# Altium PCB react4.PcbDoc
Units mil, origin at the board's own origin, x right, y up, seen from the top; angles counter-clockwise.
Board outline 3937.01 x 3937.01 mil, 2 copper layers (Top Layer, Bottom Layer), stack 61.756 mil thick; 64 components, 47 nets, 185 pads, 190 vias.
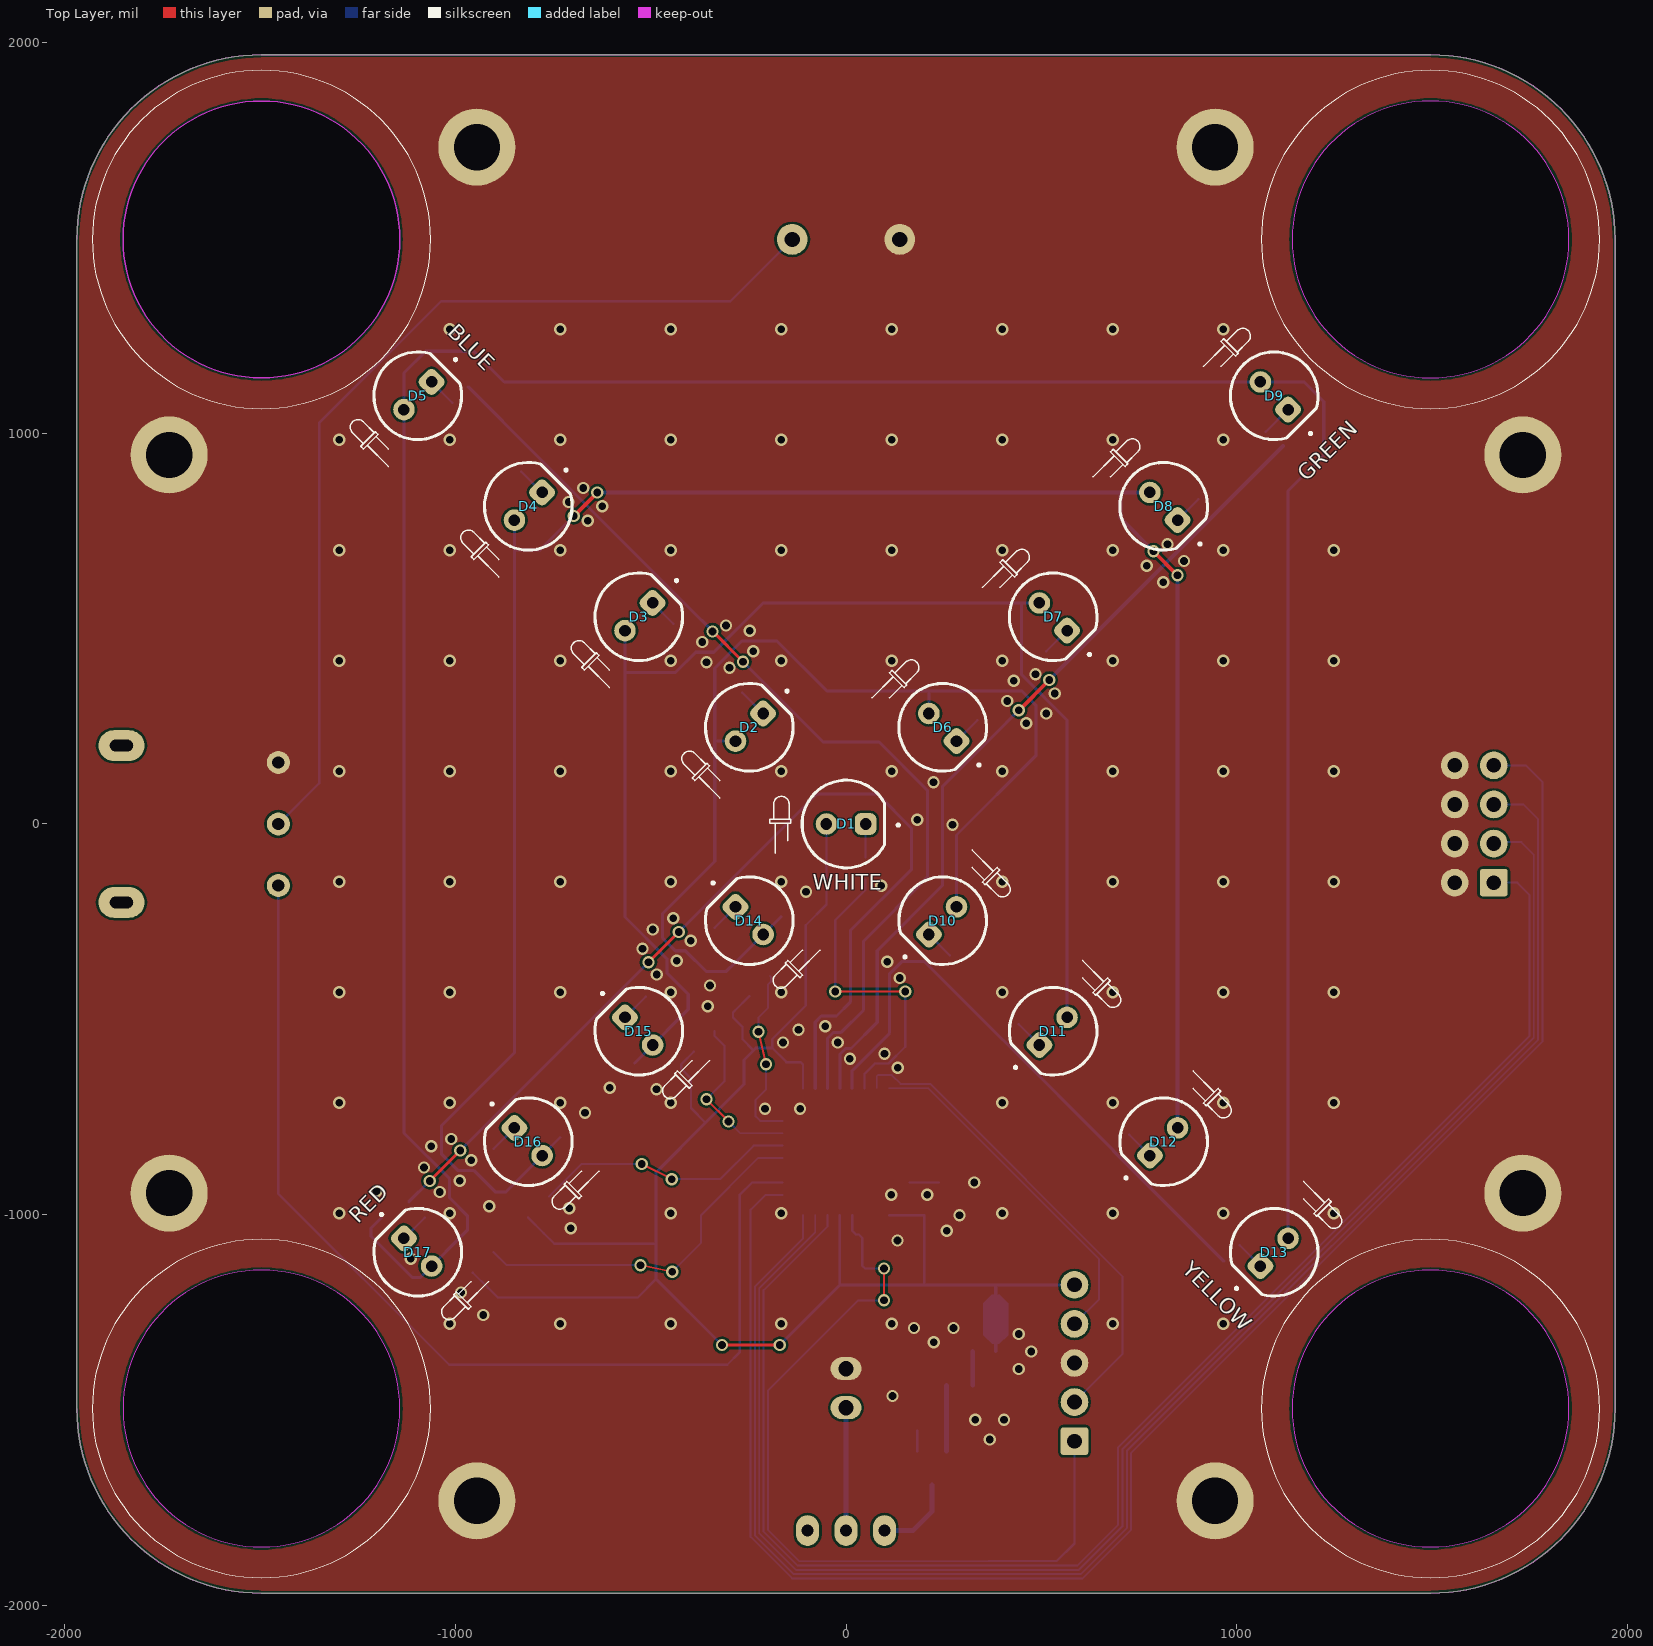
[diagram p0: Top Layer view]
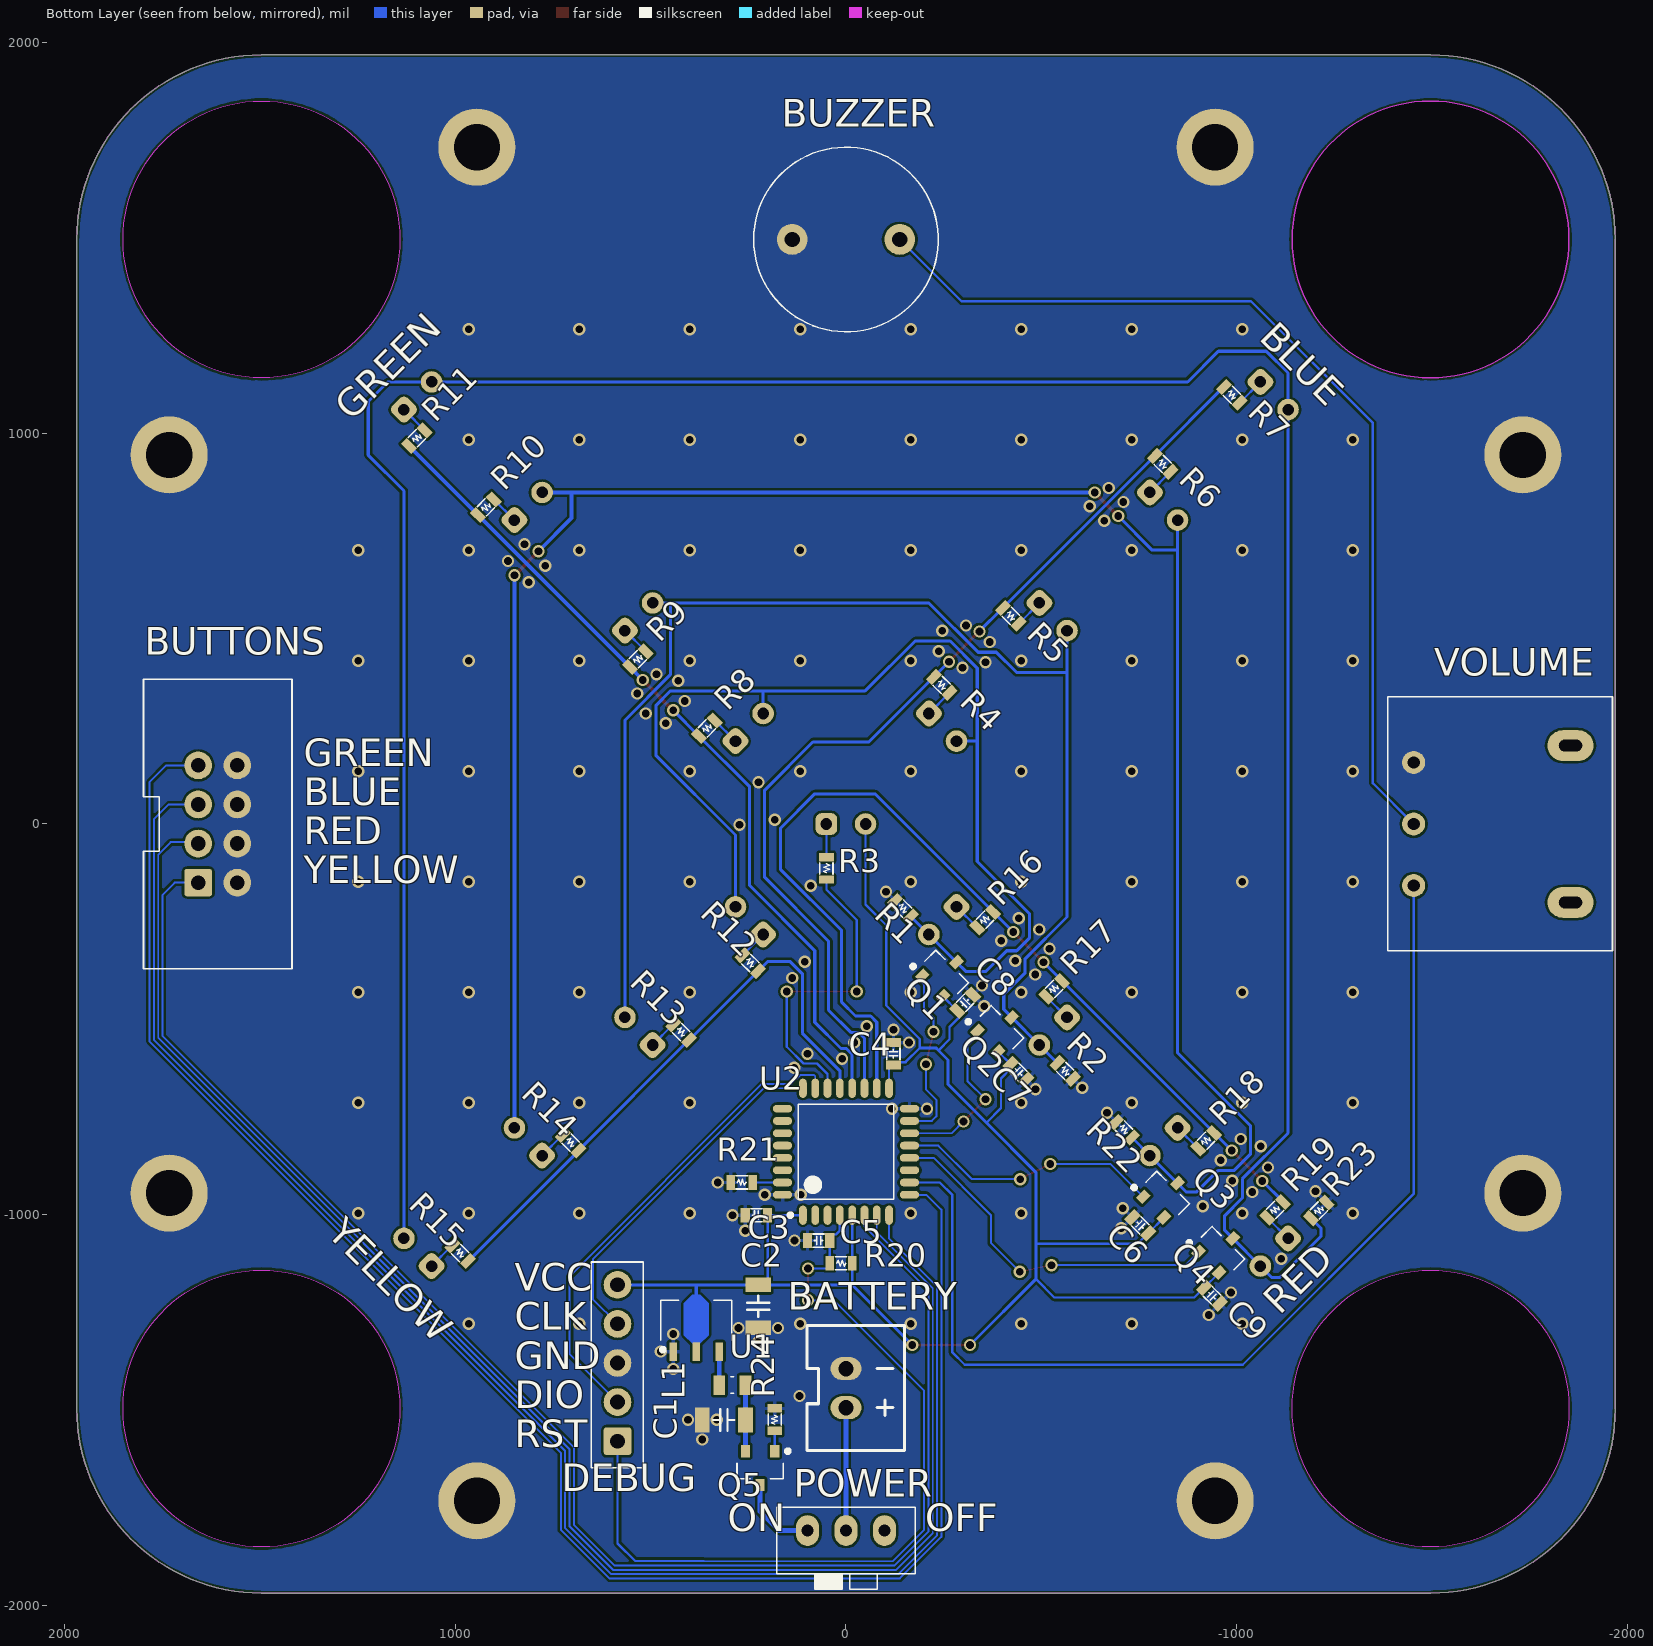
[diagram p1: Bottom Layer view, seen from below]
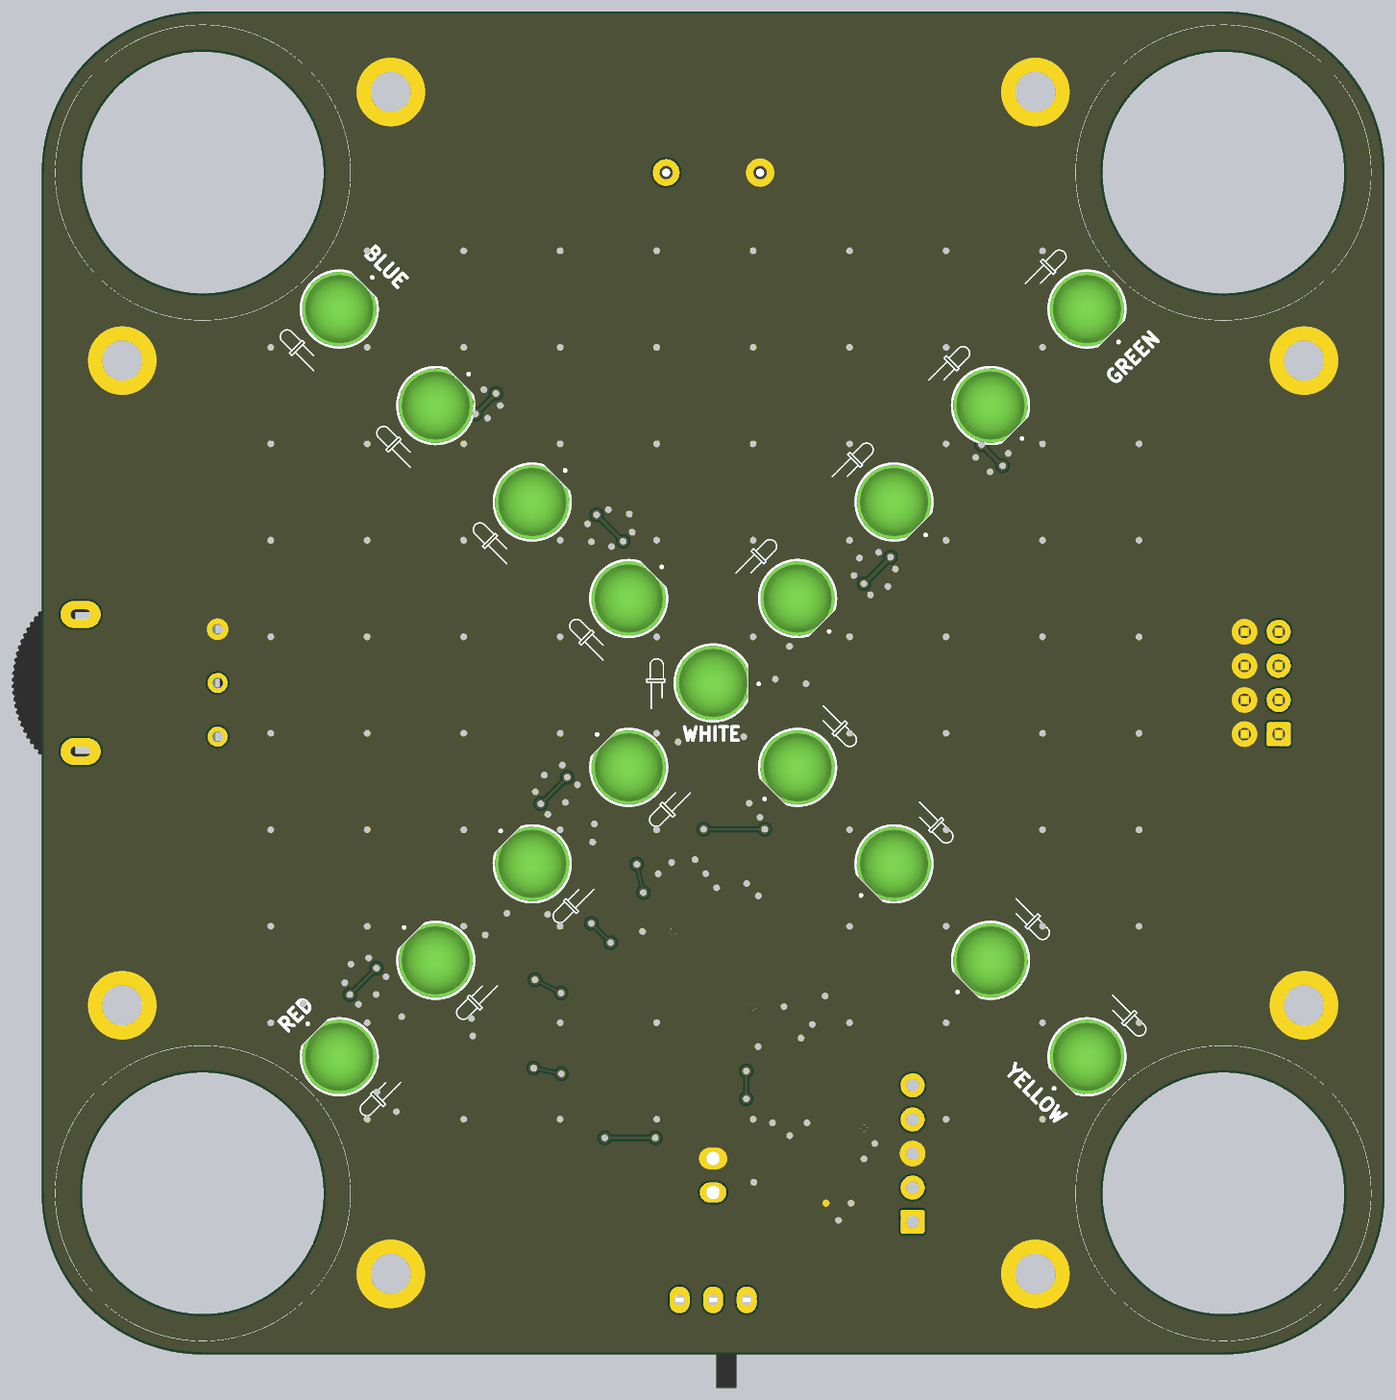
[diagram p2: 3D render of the assembled board from above, using the file's embedded part models]
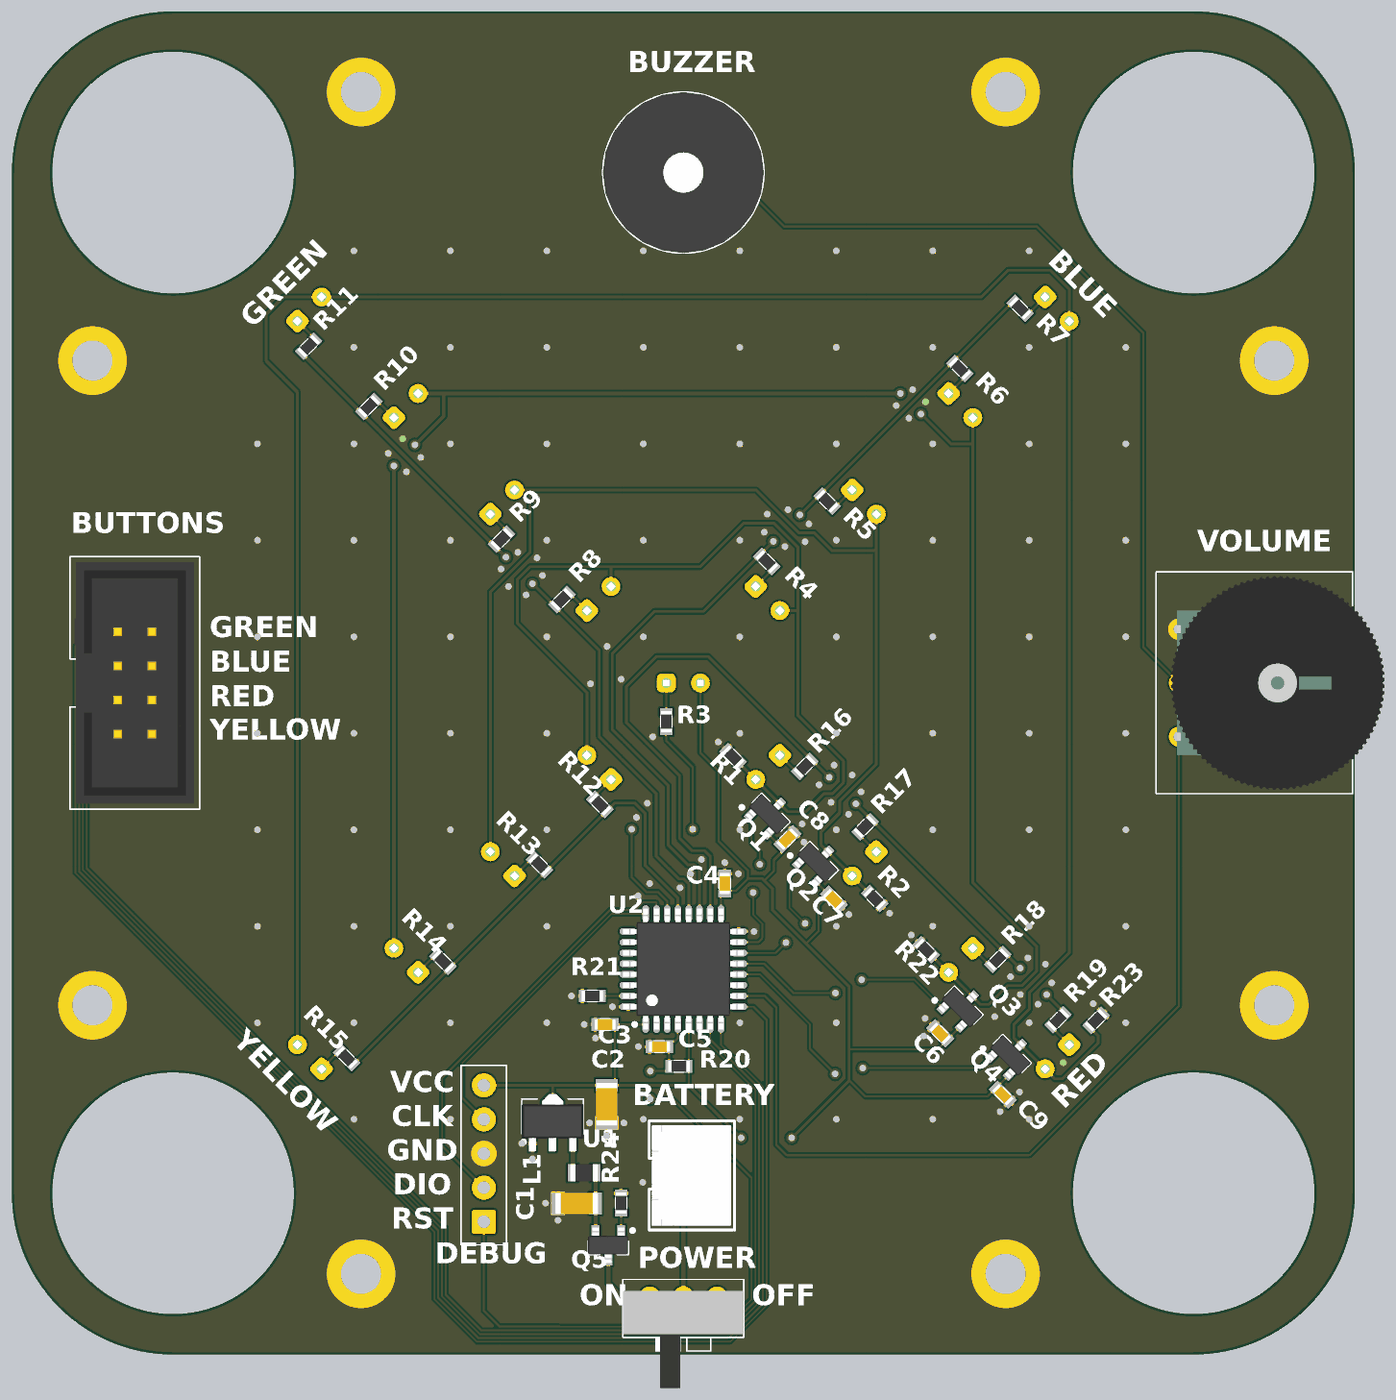
[diagram p3: 3D render of the assembled board from below, using the file's embedded part models]

## Layer stack, top to bottom
Top Solder: solder mask 1, SM-001, Dk 4
Top Layer: signal copper 1.378
Dielectric 1: core 59, Core-043, Dk 4.3
Bottom Layer: signal copper 1.378
Bottom Solder: solder mask 1, SM-001, Dk 4

## Board outline
-1968.5,-1496.06 ccw(c-1496.06,-1496.06) -1496.06,-1968.5 1496.06,-1968.5 ccw(c1496.06,-1496.06) 1968.5,-1496.06 1968.5,1496.06 ccw(c1496.06,1496.06) 1496.06,1968.5 -1496.06,1968.5 ccw(c-1496.06,1496.06) -1968.5,1496.06
cut-out: 1141.73,-1496.06 ccw(c1496.06,-1496.06) 1496.06,-1850.39 ccw(c1496.06,-1496.06) 1850.39,-1496.06 ccw(c1496.06,-1496.06) 1496.06,-1141.73 ccw(c1496.06,-1496.06)
cut-out: -1850.39,-1496.06 ccw(c-1496.06,-1496.06) -1496.06,-1850.39 ccw(c-1496.06,-1496.06) -1141.73,-1496.06 ccw(c-1496.06,-1496.06) -1496.06,-1141.73 ccw(c-1496.06,-1496.06)
cut-out: -1496.06,1141.73 cw(c-1496.06,1496.06) -1850.39,1496.06 cw(c-1496.06,1496.06) -1496.06,1850.39 cw(c-1496.06,1496.06) -1141.73,1496.06 cw(c-1496.06,1496.06)
cut-out: 1141.73,1496.06 ccw(c1496.06,1496.06) 1496.06,1141.73 ccw(c1496.06,1496.06) 1850.39,1496.06 ccw(c1496.06,1496.06) 1496.06,1850.39 ccw(c1496.06,1496.06)

## Design rules (kind name [scope] priority, off if disabled: settings)
Clearance [All] p1: gap=6 ignorepadtopadclearanceinfootprint=FALSE
HoleSize [All] p1: absolutevalues=TRUE maxlimit=300 minlimit=1 maxpercent=80.000 minpercent=20.000
MinimumSolderMaskSliver [All] p1: minsoldermaskwidth=5
PolygonConnect BIG_PADS [InNet('GND') vs AsMM(PadXSize_AllLayers) > 1] p1: connectstyle=Direct reliefconductorwidth=10 reliefentries=4 polygonreliefangle="90 Angle" airgapwidth=10
PolygonConnect GND_VIA [All vs PadViaLibraryTemplate='gnd_via'] p2: connectstyle=Direct reliefconductorwidth=10 reliefentries=4 polygonreliefangle="90 Angle" airgapwidth=10
PolygonConnect [All] p3: connectstyle=Relief reliefconductorwidth=10 reliefentries=4 polygonreliefangle="90 Angle" airgapwidth=6
RoomDefinition [OnLayer('Bottom Layer') And ComponentType = 'Standard'] p1: confinementstyle=ConfineIn formatcopy=TRUE lockcomponents=FALSE outline 334.65,1968.51 1968.5,334.65 1968.5,-334.65 334.65,-1968.5 334.65,-2165.35 -334.65,-2165.35 -334.65,-1968.5 -1968.5,-334.65 -2165.35,-334.65 -2165.35,334.65 -1968.5,334.65 -334.65,1968.5
RoutingVias [All] p1: holewidth=28 width=50 viastyle="Through Hole" minholewidth=28 minwidth=50 maxholewidth=28 maxwidth=50 useviatemplates=TRUE viatemplateguid#1={0382FDFF-0C0C-4C60-A3A5-E7C098C6B0BB} viatemplateguid#2={80516C12-B6F9-4413-913B-5A1EBC396472} viatemplatename#1=gnd_via viatemplatename#2=routing_via
SilkToSilkClearance [All] p1: silktosilkclearance=0
SilkToSolderMaskClearance [IsPad] p1: minsilkscreentomaskgap=0 clearancetoexposedcopper=TRUE
SolderMaskExpansion [All] p1: expansion=1.97 istentingtop=FALSE
Width [All] p1: maxlimit=100 minlimit=5 preferedwidth=5 minimp=50.000000 maximp=50.000000 favimp=50.000000
26 further rules are at their usual default settings.

## Components (designator, comment, footprint, x,y, rotation, side; value= is the part's Value field where it differs from the comment)
BATTERY "BATTERY" BATTERY_CONNECTOR 0,-1443.82 r90 bottom
BUTTONS "CON8" CON8 1657.95,-150 r90 bottom
BUZZER "BUZZER" PIEZO_BUZZER 0,1496.06 r180 bottom
C1 "Capacitor" CAPC_1206_3216X16L 312.41,-1525.56 r180 bottom value=10uF
C2 "Capacitor" CAPC_1206_3216X16L 224.59,-1234.61 r90 bottom value=10uF
C3 "CAPACITOR" CAPC_0603_1608X08L 229.16,-1001.19 r180 bottom value=100nF
C4 "CAPACITOR" CAPC_0603_1608X08L -121.47,-588.02 r270 bottom value=100nF
C5 "CAPACITOR" CAPC_0603_1608X08L 70.07,-1066.03 r180 bottom value=100nF
C6 "CAPACITOR" CAPC_0603_1608X08L -753.19,-1027.1 r225 bottom value=100nF
C7 "CAPACITOR" CAPC_0603_1608X08L -441.46,-634.67 r45 bottom value=100nF
C8 "CAPACITOR" CAPC_0603_1608X08L -304.84,-457.67 r315 bottom value=100nF
C9 "CAPACITOR" CAPC_0603_1608X08L -936.69,-1207.18 r45 bottom value=100nF
D1 "WHITE" "LED WHITE" 0,0 r90 top value=10mA
D2 "BLUE" "LED BLUE" -247.49,247.49 r135 top value=2mA
D3 "BLUE" "LED BLUE" -530.33,530.33 r135 top value=2mA
D4 "BLUE" "LED BLUE" -813.17,813.17 r135 top value=2mA
D5 "BLUE" "LED BLUE" -1096.02,1096.02 r135 top value=2mA
D6 "GREEN" "LED GREEN" 247.49,247.49 r45 top value=16mA
D7 "GREEN" "LED GREEN" 530.33,530.33 r45 top value=16mA
D8 "GREEN" "LED GREEN" 813.17,813.17 r45 top value=16mA
D9 "GREEN" "LED GREEN" 1096.02,1096.02 r45 top value=16mA
D10 "YELLOW" "LED YELLOW" 247.49,-247.49 r315 top value=10mA
D11 "YELLOW" "LED YELLOW" 530.33,-530.33 r315 top value=10mA
D12 "YELLOW" "LED YELLOW" 813.17,-813.17 r315 top value=10mA
D13 "YELLOW" "LED YELLOW" 1096.02,-1096.02 r315 top value=10mA
D14 "RED" "LED RED" -247.49,-247.49 r225 top value=5mA
D15 "RED" "LED RED" -530.33,-530.33 r225 top value=5mA
D16 "RED" "LED RED" -813.17,-813.17 r225 top value=5mA
D17 "RED" "LED RED" -1096.02,-1096.02 r225 top value=5mA
DEBUG "CON5" CON5 584.78,-1579.49 r90 bottom
L1 "INDUCTOR" Chip2PinSM127P600-8N 290.76,-1436.12 r0 bottom value=6.8uH
POWER "MK-12D18" MK-12D18 0,-1808.41 r180 bottom
Q1 "NX2301P" SOT95P237X110-3L -252.22,-384.18 r135 bottom
Q2 "NX2301P" SOT95P237X110-3L -393.64,-525.6 r135 bottom
Q3 "NX2301P" SOT95P237X110-3L -817.91,-949.86 r135 bottom
Q4 "NX2301P" SOT95P237X110-3L -959.33,-1091.28 r135 bottom
Q5 "NX2301P" SOT95P237X110-3L 219.89,-1648.4 r270 bottom
R1 "Resistor" RESC_0603_1608X08L -145.99,-216.7 r45 bottom value=10K
R2 "Resistor" RESC_0603_1608X08L -561.12,-631.83 r225 bottom value=10K
R3 "Resistor" RESC_0603_1608X08L 50,-113.54 r90 bottom value=330
R4 "Resistor" RESC_0603_1608X08L -244.98,356.06 r225 bottom value=1.6K
R5 "Resistor" RESC_0603_1608X08L -421.76,532.84 r225 bottom value=1.6K
R6 "Resistor" RESC_0603_1608X08L -810.67,921.74 r225 bottom value=1.6K
R7 "Resistor" RESC_0603_1608X08L -987.44,1098.52 r225 bottom value=1.6K
R8 "Resistor" RESC_0603_1608X08L 356.06,244.98 r135 bottom value=200
R9 "Resistor" RESC_0603_1608X08L 532.84,421.76 r135 bottom value=200
R10 "Resistor" RESC_0603_1608X08L 921.74,810.67 r135 bottom value=200
R11 "Resistor" RESC_0603_1608X08L 1098.52,987.44 r135 bottom value=200
R12 "Resistor" RESC_0603_1608X08L 244.98,-356.06 r45 bottom value=330
R13 "Resistor" RESC_0603_1608X08L 421.76,-532.84 r45 bottom value=330
R14 "Resistor" RESC_0603_1608X08L 704.6,-815.68 r45 bottom value=330
R15 "Resistor" RESC_0603_1608X08L 987.44,-1098.52 r45 bottom value=330
R16 "Resistor" RESC_0603_1608X08L -356.06,-244.98 r315 bottom value=680
R17 "Resistor" RESC_0603_1608X08L -532.84,-421.76 r315 bottom value=680
R18 "Resistor" RESC_0603_1608X08L -921.74,-810.67 r315 bottom value=680
R19 "Resistor" RESC_0603_1608X08L -1098.52,-987.44 r315 bottom value=680
R20 "Resistor" RESC_0603_1608X08L 12.79,-1124.08 r180 bottom value=10K
R21 "Resistor" RESC_0603_1608X08L 266.92,-917.53 r0 bottom value=10K
R22 "Resistor" RESC_0603_1608X08L -711.67,-782.38 r45 bottom value=10K
R23 "Resistor" RESC_0603_1608X08L -1210.18,-988.82 r135 bottom value=10K
R24 "Resistor" RESC_0603_1608X08L 182.49,-1524.48 r270 bottom value=1K
U1 "QX2304L33E" SOT89-150P350X160-3L 383.28,-1285.3 r90 bottom
U2 "STM32F030K6" TQFP80P900X900X160-32L -0.01,-838.79 r90 bottom
VOLUME "POTENTIOMETER" POTENTIOMETER -1742.18,0 r270 bottom value=10K

## Footprints (in the part's own frame and the unit in brackets; to place one, negate y for a bottom-side part, rotate by r counter-clockwise, add the part's x,y. Pads: shape width x height; smd on the part's side, far side on the other; paste and mask are expansions set on the pad)
BATTERY_CONNECTOR [mm]
  oval 1.5x2 hole 1: 1(1.27,0) 2(-1.27,0)
  silkscreen extent -4.06,-3.81 4.06,2.54, body extent -3.75,-3.55 3.75,2.35, height 7
CAPC_0603_1608X08L [mm] "Chip Capacitor 0603"
  rrect1% 0.6x0.95 smd: 1(-0.725,0) 2(0.725,0)
  silkscreen extent -0.38,-0.43 0.38,0.43, body extent -0.8,-0.4 0.8,0.4, height 0.8
CAPC_1206_3216X16L [mm] "Chip Capacitor 1206"
  rrect1% 0.95x1.65 smd: 1(-1.4,0) 2(1.4,0)
  silkscreen extent -0.69,-0.71 0.69,0.71, body extent -1.6,-0.8 1.6,0.8, height 1.6
Chip2PinSM127P600-8N [mm] "Inductor 0805"
  rrect1% 0.76x1.27 smd: 1(-0.85,0) 2(0.85,0)
  silkscreen extent -0.1,-0.54 0.1,0.54, body extent -1.05,-0.65 1.05,0.65, height 0.5
CON5 [mm]
  rrect20% 1.8x1.8 hole 0.95: 1(0,0)
  rrect100% 1.8x1.8 hole 0.95: 2(2.54,0) 3(5.08,0) 4(7.62,0) 5(10.16,0)
CON8 [mm] "0.1 inch 8 way"
  rrect20% 1.8x1.8 hole 0.95: 1(0,0)
  rrect100% 1.8x1.8 hole 0.95: 2(0,-2.54) 3(2.54,0) 4(2.54,-2.54) 5(5.08,0) 6(5.08,-2.54) 7(7.62,0) 8(7.62,-2.54)
  silkscreen extent -5.59,-6.1 13.21,3.56, body extent -5.17,-5.67 12.79,3.23, height 9
"LED BLUE" [mm] "5MM through hole LED"
  rrect50% 1.4x1.4 hole 0.75: 1(0,-1.27)
  round 1.4 hole 0.75: 2(0,1.27)
  silkscreen extent -2.85,-3.47 2.85,4.95, body extent -2.8,-2.55 2.8,2.8, height 8.5
"LED GREEN" [mm] "5MM through hole LED"
  rrect50% 1.4x1.4 hole 0.75: 1(0,-1.27)
  round 1.4 hole 0.75: 2(0,1.27)
  silkscreen extent -2.85,-3.47 2.85,4.95, body extent -2.8,-2.55 2.8,2.8, height 8.5
"LED RED" [mm] "5MM through hole LED"
  rrect50% 1.4x1.4 hole 0.75: 1(0,-1.27)
  round 1.4 hole 0.75: 2(0,1.27)
  silkscreen extent -2.85,-3.47 2.85,4.95, body extent -2.8,-2.55 2.8,2.8, height 8.5
"LED WHITE" [mm] "5MM through hole LED"
  rrect50% 1.4x1.4 hole 0.75: 1(0,-1.27)
  round 1.4 hole 0.75: 2(0,1.27)
  silkscreen extent -2.85,-3.47 2.85,4.95, body extent -2.8,-2.55 2.8,2.8, height 8.5
"LED YELLOW" [mm] "5MM through hole LED"
  rrect50% 1.4x1.4 hole 0.75: 1(0,-1.27)
  round 1.4 hole 0.75: 2(0,1.27)
  silkscreen extent -2.85,-3.47 2.85,4.95, body extent -2.8,-2.55 2.8,2.8, height 8.5
MK-12D18 [mm] "SPDT Side mount through hole power 0.5A switch"
  rrect100% 1.5x2 hole 0.8: 1(-2.5,0) 2(0,0) 3(2.5,0)
  silkscreen extent -4.5,-3.81 4.5,1.52, body extent -4.5,-6.55 4.5,0.65, height 3.5
PIEZO_BUZZER [mm] "Piezo buzzer"
  round 2 hole 1: 1(3.5,0) 2(-3.5,0)
  silkscreen extent -6,-6 6,6, body extent -6,-6 6,6, height 10
POTENTIOMETER [mm] "B103 thumbwheel pot 16x2"
  oval 2x3 hole 1.5 slot 0.75 at 0 deg: 0(-5.1,2.85) 0(5.1,2.85)
  round 1.5 hole 0.8: 1(4,-7.35) 2(0,-7.35) 3(-4,-7.35)
  body extent -7.97,-7.97 7.97,7.97, height 3.2
RESC_0603_1608X08L [mm] "Chip Resistor, 2-Leads, Body 1.60x0.80mm, IPC High Density"
  rrect1% 0.55x0.95 smd: 1(-0.725,0) 2(0.725,0)
  silkscreen extent -0.38,-0.42 0.38,0.42, body extent -0.8,-0.4 0.8,0.4, height 0.8
SOT89-150P350X160-3L [mm] "SOT89, 3-Leads, Body 4.50x2.45mm, Pitch 1.50mm, Lead Span 3.5mm, IPC High Density"
  rrect1% 1.2x0.5 smd: 1(-1.65,1.5) 2(-1.65,0) 3(-1.65,-1.5)
  Top Layer region: -1.156,0.244 -0.6,0.8 1.5,0.8 2.05,0.25 2.05,-0.25 1.5,-0.8 -0.6,-0.8 -1.156,-0.244
  silkscreen extent -1.65,-2.3 1.67,2.3, body extent -2.2,-2.3 2,2.3, height 1.6
SOT95P237X110-3L [mm] "SOT23, 3-Leads, Body 2.90x2.37mm, Pitch 0.95mm, IPC High Density"
  rrect1% 0.8x0.6 smd: 1(-1.1,0.95) 2(-1.1,-0.95) 3(1.1,0)
  silkscreen extent -1.22,-1.5 0.7,1.92, body extent -1.32,-1.5 1.32,1.5, height 1.1
TQFP80P900X900X160-32L [mm] "TQFP, 32-Leads, Body 7.00x7.00mm, Pitch 0.80mm, IPC High Density"
  oval 1.25x0.5 smd mask+0.05: 1(-4.125,2.8) 2(-4.125,2) 3(-4.125,1.2) 4(-4.125,0.4) 5(-4.125,-0.4) 6(-4.125,-1.2) 7(-4.125,-2) 8(-4.125,-2.8) 17(4.125,-2.8) 18(4.125,-2) 19(4.125,-1.2) 20(4.125,-0.4) 21(4.125,0.4) 22(4.125,1.2) 23(4.125,2) 24(4.125,2.8)
  oval 0.5x1.25 smd mask+0.05: 9(-2.8,-4.125) 10(-2,-4.125) 11(-1.2,-4.125) 12(-0.4,-4.125) 13(0.4,-4.125) 14(1.2,-4.125) 15(2,-4.125) 16(2.8,-4.125) 25(2.8,4.125) 26(2,4.125) 27(1.2,4.125) 28(0.4,4.125) 29(-0.4,4.125) 30(-1.2,4.125) 31(-2,4.125) 32(-2.8,4.125)
  silkscreen extent -4.25,-3.1 3.1,3.75, body extent -4.5,-4.5 4.5,4.5, height 1.6

## Part data
BUTTONS: "2 x 4 2.54mm IDC board connector"
BUZZER: "3V 12mm piezo buzzer"
C1 C2: library part CAPACITOR
C3 C4 C5 C6 C7 C8 C9: "Capacitor"
D1 D2 D3 D4 D5 D6 D7 D8 D9 D10 D11 D12 D13 D14 D15 D16 D17: library part LED, "5mm through hole LED"
L1: "200mA 1206 SMD Inductor"
POWER: library part "SPDT SWITCH", "DIP,9.1x3.5x3.5mm Toggle Switch"
Q1 Q2 Q3 Q4 Q5: library part MOSFET-P, "P-MOSFET -20V -2A 400mW NX2301P or equivalent"
R1 R2 R3 R4 R5 R6 R7 R8 R9 R10 R11 R12 R13 R14 R15 R16 R17 R18 R19 R20 R21 R22 R23 R24: library part RESISTOR, "125mW 0603 SMD resistor"
U1: "3.3v boost regulator 1A 0.5W"
U2: "STM32F030K6 QFP32 48MHz"
VOLUME: "10K audio pot 16x2mm thumbwheel"

## Free pads (board coordinates)
  round 196.85 hole 118.11: 4(944.88,1732.28) 5(-944.88,1732.28) 6(-1732.28,944.88) 7(-1732.28,-944.88) 8(1732.28,944.88) 9(1732.28,-944.88) 10(-944.88,-1732.28) 11(944.88,-1732.28)

## Via types
v1: diameter 31.5, hole 19.68, Top Layer to Bottom Layer, tented both sides, 190 vias

## Nets (pads, with @x,y where several pads share a name; then routed paths per layer and width w, separated by ;. In a path a pad name is that pad's centre, name@x,y a point inside that pad or via, vN(x,y) a via of type N, cw(c..) or ccw(c..) an arc to the next point about the centre after c; other vN are vias at no path point)
BOOT: R21.1 U2.31 | length 76
  Bottom Layer w5: U2.31 R21.1
BTN1: BUTTONS.1 U2.6 | length 4016.9
  Bottom Layer w5: U2.6 -47.25,-1029.18 -211.02,-1192.95 -211.02,-1810.97 -124.02,-1897.97 591.82,-1897.97 696.69,-1793.11 696.69,-1595.63 1749.22,-543.1 1749.22,-181.08 1718.14,-150 BUTTONS.1
BTN2: BUTTONS.3 U2.7 | length 4160.5
  Bottom Layer w5: U2.7 -78.75,-1045.12 -222.02,-1188.39 -222.02,-1815.53 -128.58,-1908.97 596.38,-1908.97 707.69,-1797.66 707.69,-1600.19 1760.22,-547.66 1760.22,-78.24 1728.4,-46.42 1661.53,-46.42 BUTTONS.3
BTN3: BUTTONS.5 U2.8 | length 4290.6
  Bottom Layer w5: U2.8 -110.24,-1061.06 -233.02,-1183.83 -233.02,-1820.08 -133.13,-1919.97 600.93,-1919.97 718.69,-1802.22 718.69,-1604.74 1771.22,-552.21 1771.22,11.61 1732.83,50 BUTTONS.5
BTN4: BUTTONS.7 U2.9 | length 4496.2
  Bottom Layer w5: U2.9 -205.84,-949.02 -244.02,-987.2 -244.02,-1824.64 -137.69,-1930.97 605.49,-1930.97 729.69,-1806.78 729.69,-1609.3 1782.22,-556.77 1782.22,107.57 1739.79,150 BUTTONS.7
BUZZ1: U2.10 VOLUME.1 | length 2690.1
  Bottom Layer w6: VOLUME.1 -1452.81,-946.68 -1015.24,-1384.25 -303.78,-1384.25 -272.28,-1352.75 -272.28,-949.93 -239.87,-917.53 U2.10
COL0: Q1.1 U2.15 | length 461.4
  Top Layer w5: v1(-224.06,-531.64) v1(-204.62,-614.68)
  Bottom Layer w5: v1(-224.06,-531.64) -224.06,-495.61 -199.99,-471.54 -199.99,-411.93 -192.37,-404.3 -192.37,-391.14 Q1.1 ; v1(-204.62,-614.68) -204.62,-679.19 -231.45,-706.02 -231.45,-748.19 -219.6,-760.05 U2.15
COL1: Q2.1 U2.14 | length 435.4
  Top Layer w5: v1(-357.16,-704.85) v1(-300.59,-761.42)
  Bottom Layer w5: v1(-357.16,-704.85) -311,-658.7 -311,-568.13 -336.57,-542.56 Q2.1 ; v1(-300.59,-761.42) -270.47,-791.54 U2.14
COL2: Q3.1 U2.13 | length 678.1
  Top Layer w5: v1(-522.61,-870.02) v1(-445.77,-908.97)
  Bottom Layer w5: Q3.1 -676.82,-870.02 v1(-522.61,-870.02) ; v1(-445.77,-908.97) -322.46,-908.97 -236.53,-823.04 U2.13
COL3: Q4.1 U2.12 | length 917.9
  Top Layer w5: v1(-526,-1129) v1(-445,-1146)
  Bottom Layer w5: Q4.1 -868.72,-1129 v1(-526,-1129) ; v1(-445,-1146) -370.83,-1071.83 -370.83,-1000.74 -224.62,-854.53 U2.12
GND: BATTERY.1 BUTTONS.2 BUTTONS.4 BUTTONS.6 BUTTONS.8 BUZZER.2 C1.1 C2.1 C3.1 C4.1 C5.1 C6.1 C7.1 C8.1 C9.1 DEBUG.3 pad.4 pad.5 pad.6 pad.7 pad.8 pad.9 pad.10 pad.11 R1.2 R2.2 R21.2 R22.2 R23.2 R24.1 U1.1 U2.16 U2.32 VOLUME.3
  other v1: 367.53,-1575.49 331,-1524.99 404.23,-1524.99 119.18,-1463.96 442.33,-1395.07 473.92,-1350.26 224.59,-1326.65 442.33,-1305.55 174.21,-1289.73 275.1,-1289.73 -1014.09,-1278.91 -731.25,-1278.91 -448.41,-1278.91 -165.56,-1278.91 117.28,-1278.91 682.97,-1278.91 965.81,-1278.91 -928.63,-1256.75 -985.53,-1199.23 -1113.8,-1113.01 131.86,-1066.03 257.66,-1041.05 -704.68,-1035 290.66,-1001.24 -1296.94,-996.07 -1014.09,-996.07 -448.41,-996.07 -165.56,-996.07 400.12,-996.07 682.97,-996.07 965.81,-996.07 1248.65,-996.07 -708.69,-983.18 -912.94,-978.15 116.14,-949.02 207.92,-949.02 -1040.09,-941.94 -1201.69,-940.11 328.29,-917.53 -988.21,-913.14 -1080,-879 -959,-861 -1061.75,-824.42 -1010,-806 -668.22,-738.93 -207.2,-728.55 -117.49,-728.57 -1296.94,-713.23 -1014.09,-713.23 -731.25,-713.23 -448.41,-713.23 400.12,-713.23 682.97,-713.23 965.81,-713.23 1248.65,-713.23 -485.15,-678.59 -604.58,-675.29 132.68,-624.01 9.99,-600.52 98.61,-588.09 -161.27,-559.47 -21.5,-559.19 -121.47,-526.47 -53,-517.86 -353.53,-466.48 -1296.94,-430.38 -1014.09,-430.38 -731.25,-430.38 -448.41,-430.38 -165.56,-430.38 400.12,-430.38 682.97,-430.38 965.81,-430.38 1248.65,-430.38 -348.26,-413.35 137.51,-394.07 -484.37,-385.06 105.79,-352.84 -432.87,-350.11 -521,-319 -397.63,-298.62 -495,-270 -442,-241 -102.53,-173.24 89.9,-157.69 -1296.94,-147.54 -1014.09,-147.54 -731.25,-147.54 -448.41,-147.54 -165.56,-147.54 400.12,-147.54 682.97,-147.54 965.81,-147.54 1248.65,-147.54 272.41,-2.31 182.49,11.06 223.87,107.19 -1296.94,135.3 -1014.09,135.3 -731.25,135.3 -448.41,135.3 -165.56,135.3 117.28,135.3 400.12,135.3 682.97,135.3 965.81,135.3 1248.65,135.3 461,258 512.5,282.68 413,315 534.11,333.89 428.98,366.5 485,383 -298,400 -356.84,413.97 -1296.94,418.15 -1014.09,418.15 -731.25,418.15 -448.41,418.15 -165.56,418.15 117.28,418.15 400.12,418.15 682.97,418.15 965.81,418.15 1248.65,418.15 -237,442 -368,466 -246,495 -307,508 812,619 770,661 865,673 -1296.94,700.99 -1014.09,700.99 -731.25,700.99 -448.41,700.99 -165.56,700.99 117.28,700.99 400.12,700.99 682.97,700.99 965.81,700.99 1248.65,700.99 823,716 -661,776 -624,813 -710,824 -672.11,859.96 -1296.94,983.83 -1014.09,983.83 -731.25,983.83 -448.41,983.83 -165.56,983.83 117.28,983.83 400.12,983.83 682.97,983.83 965.81,983.83 -1014.09,1266.67 -731.25,1266.67 -448.41,1266.67 -165.56,1266.67 117.28,1266.67 400.12,1266.67 682.97,1266.67 965.81,1266.67
NetBATTERY_2: BATTERY.2 POWER.2 | length 314.7
  Bottom Layer w12: POWER.2 -0.16,-1808.25 -0.16,-1493.98 BATTERY.2
NetBUZZER_1: BUZZER.1 VOLUME.2 | length 2474.6
  Bottom Layer w6: VOLUME.2 -1348.49,104.32 -1348.49,1026.04 -1036.51,1338.02 -295.84,1338.02 BUZZER.1
NetD1_1: D1.1 R3.2 | length 85
  Bottom Layer w6: R3.2 D1.1
NetD2_1: D2.1 R4.2 | length 75
  Bottom Layer w6: R4.2 D2.1
NetD2_2: D2.2 D6.2 D10.2 D14.2 Q1.3 R1.1 | length 2773.3
  Bottom Layer w8: D2.2 -336,212.13 ; R1.1 D14.2 Q1.3 -306.51,-377.22 -358.2,-377.22 -411.05,-324.37 -436.86,-324.37 -469.25,-291.97 -469.25,-229.25 -336,-96 -336,212.13 ; D6.2 212.13,340.75 ; D10.2 282.84,-28.29 486.75,175.62 486.75,303.07 449.07,340.75 212.13,340.75 ; -336,212.13 -336,398.84 -266.38,468.46 -176.8,468.46 -49.09,340.75 212.13,340.75
NetD3_1: D3.1 R5.2 | length 75
  Bottom Layer w6: D3.1 R5.2
NetD3_2: D3.2 D7.2 D11.2 D15.2 Q2.3 R2.1 | length 3473.6
  Bottom Layer w8: D3.2 -565.69,388.01 ; R2.1 D15.2 Q2.3 -403.75,-474.46 -403.75,-435.62 -458.62,-380.75 -458.62,-344.97 -565.69,-237.9 -565.69,388.01 ; D7.2 449.38,565.69 ; D11.2 565.69,265.9 449.38,382.2 449.38,565.69 ; -565.69,388.01 -436.54,388.01 -384.84,439.71 -338.1,439.71 -212.13,565.69 449.38,565.69
NetD4_1: D4.1 R6.2 | length 75
  Bottom Layer w6: R6.2 D4.1
NetD4_2: D4.2 D8.2 D12.2 D16.2 Q3.3 R22.1 | length 5476.2
  Top Layer w10: v1(-696.5,788.42) v1(-636.4,848.53) ; v1(786.95,697.98) v1(848.53,636.4)
  Bottom Layer w8: D4.2 -848.53,700.97 ; R22.1 D16.2 Q3.3 -871.5,-942.21 -896.71,-942.21 -951.66,-887.25 -992.44,-887.25 -1035.75,-843.94 -1035.75,-773.08 -848.53,-585.86 -848.53,700.97 ; v1(-696.5,788.42) -783.96,700.97 -848.53,700.97
  Bottom Layer w10: v1(-636.4,848.53) 702.22,848.53 ; D8.2 702.22,848.53 ; v1(786.95,697.98) 702.22,782.7 702.22,848.53 ; D12.2 v1(848.53,636.4)
NetD5_1: D5.1 R7.2 | length 75
  Bottom Layer w6: D5.1 R7.2
NetD5_2: D5.2 D9.2 D13.2 D17.2 Q4.3 R23.1 | length 7269.4
  Bottom Layer w8: R23.1 -1216.18,-1035.18 -1216.18,-1054.47 -1110.1,-1160.56 -1089.84,-1160.56 D17.2 Q4.3 -969.07,-1039.78 -969.07,-1002.37 -1014.35,-957.09 -1014.35,-908.24 -1131.37,-791.22 D5.2 -1131.37,1154.63 -1076,1210 -953,1210 -874.37,1131.37 D9.2 1172.77,1131.37 1222.9,1081.23 1222.9,944.06 1131.37,852.53 D13.2
NetD6_1: D6.1 R8.2 | length 75
  Bottom Layer w6: D6.1 R8.2
NetD7_1: D7.1 R9.2 | length 75
  Bottom Layer w6: R9.2 D7.1
NetD8_1: D8.1 R10.2 | length 75
  Bottom Layer w6: D8.1 R10.2
NetD9_1: D9.1 R11.2 | length 80.2
  Bottom Layer w6: R11.2@1074.65,1003.94 D9.1
NetD10_1: D10.1 R12.2 | length 75
  Bottom Layer w6: D10.1 R12.2
NetD11_1: D11.1 R13.2 | length 75
  Bottom Layer w6: R13.2 D11.1
NetD12_1: D12.1 R14.2 | length 75
  Bottom Layer w6: R14.2 D12.1
NetD13_1: D13.1 R15.2 | length 75
  Bottom Layer w6: R15.2 D13.1
NetD14_1: D14.1 R16.2 | length 75
  Bottom Layer w6: R16.2 D14.1
NetD15_1: D15.1 R17.2 | length 75
  Bottom Layer w6: D15.1 R17.2
NetD16_1: D16.1 R18.2 | length 75
  Bottom Layer w6: R18.2 D16.1
NetD17_1: D17.1 R19.2 | length 75
  Bottom Layer w6: D17.1 R19.2
NetL1_2: L1.2 U1.3 | length 85.9
  Bottom Layer w12: L1.2 U1.3
NetPOWER_1: POWER.1 Q5.3 | length 209.7
  Bottom Layer w12: POWER.1 171.27,-1808.41 219.89,-1759.78 Q5.3
NetQ5_1: Q5.1 R24.2 | length 52.1
  Bottom Layer w6: Q5.1 R24.2
RESET: C5.2 DEBUG.1 R20.1 U2.4 | length 2131.4
  Top Layer w6: v1(97.1,-1219.2) v1(97.1,-1137.73)
  Bottom Layer w5: v1(97.1,-1219.2) 31.09,-1219.2 -200.02,-1450.32 -200.02,-1806.41 -119.46,-1886.97 363.86,-1886.97
  Bottom Layer w6: U2.4 15.74,-1040.6 25.76,-1050.62 32.72,-1050.62 41.53,-1059.43 C5.2 R20.1@41.53,-1123.89 ; R20.1 41.33,-1129.9 49.16,-1137.73 v1(97.1,-1137.73) ; 363.86,-1886.47 539.61,-1886.47 584.78,-1841.3 DEBUG.1
ROW0: R4.1 R5.1 R6.1 R7.1 U2.19 | length 2483.3
  Top Layer w8: v1(-341.47,492.91) v1(-263.69,415.13)
  Bottom Layer w8: R7.1 R6.1 R5.1 v1(-341.47,492.91) ; v1(-263.69,415.13) R4.1 -58.56,210 84.65,210 208.24,86.41 208.24,-136.42 44.63,-300.03 44.63,-476.39 -12.42,-533.44 -32.17,-533.44 -47.25,-548.53 U2.19
ROW1: R8.1 R9.1 R10.1 R11.1 U2.20 | length 2121.4
  Top Layer w10: v1(442.35,290.9) v1(520.13,368.68)
  Bottom Layer w8: U2.20 -15.76,-589.86 -0.67,-574.77 12.78,-574.77 80.05,-507.51 80.05,-324.19 246.66,-157.57 246.66,95.22 R8.1 v1(442.35,290.9)
  Bottom Layer w10: v1(520.13,368.68) R9.1 R10.1 R11.1
ROW2: R12.1 R13.1 R14.1 R15.1 U2.21 | length 1518.5
  Bottom Layer w8: U2.21 15.74,-631.19 111.76,-535.17 111.76,-383.29 142.78,-352.27 200.82,-352.27 R12.1 R13.1 ; R13.1@402.02,-553.02 684.42,-835.42 R14.1 R15.1
ROW3: R16.1 R17.1 R18.1 R19.1 U2.18 | length 2545.8
  Top Layer w8: v1(-1065.06,-913.62) v1(-987.28,-835.84) ; v1(-505.59,-354.15) v1(-427.81,-276.37)
  Bottom Layer w8: R19.1 v1(-1065.06,-913.62) ; v1(-987.28,-835.84) R18.1 R17.1 v1(-505.59,-354.15) ; v1(-427.81,-276.37) R16.1 -74.18,77.26 79.88,77.26 167.32,-10.18 167.32,-116.68 11.24,-272.76 11.24,-456.04 -24.18,-491.46 -63.01,-491.46 -78.75,-507.2 U2.18
SNAP0: R3.1 U2.22 | length 809.1
  Top Layer w6: v1(-27.64,-428.88) v1(151.45,-428.88)
  Bottom Layer w6: v1(-27.64,-428.88) -27.87,-428.65 -27.87,-246.2 50,-168.33 R3.1 ; U2.22 47.24,-640.01 74.4,-612.84 108.86,-612.84 151.45,-570.24 v1(151.45,-428.88)
SWCLK: DEBUG.4 U2.24 | length 910.5
  Bottom Layer w5: U2.24 210.56,-676.38 647.62,-1113.44 647.62,-1216.66 DEBUG.4
SWDIO: DEBUG.2 U2.23 | length 1246.3
  Bottom Layer w5: U2.23 78.73,-645.71 81.66,-642.78 117.33,-642.78 139.93,-665.38 215.12,-665.38 707.21,-1157.48 707.21,-1357.06 DEBUG.2
VBAT: C1.2 L1.1 Q5.2 | length 168.2
  Bottom Layer w12: Q5.2 C1.2 ; C1.2@257.29,-1524.77 L1.1
VCC: C2.2 C3.2 C4.2 C6.2 C7.2 C8.2 C9.2 D1.2 DEBUG.5 Q1.2 Q2.2 Q3.2 Q4.2 R20.2 U1.2 U2.1 U2.5 U2.17 | length 4617.9
  Top Layer w8: v1(-317.36,-1333.57) v1(-169.39,-1333.57)
  Bottom Layer w6: Q4.2 C9.2 -891.5,-1212 -533.25,-1212 -486.09,-1164.84 ; Q3.2 C6.2 -746.66,-1074 -486.09,-1074 ; Q2.2 C7.2 -421.28,-626.66 -396.78,-651.16 -396.78,-727.22 -359.54,-764.46 ; Q1.2 C8.2 -289.4,-482.6 -289.4,-495.06 -265.02,-519.45 -265.02,-551.12 -236.57,-579.57 ; U2.17 -110.24,-615.37 -116.13,-609.49 -152.51,-609.49 -189,-573 -189,-550.12 -103.15,-464.27 -103.15,-259.15 -50,-206 D1.2 ; -15.76,-1179.49 R20.2 U2.5 ; U2.1 C3.2 C2.2@200.62,-1179.49
  Bottom Layer w8: v1(-317.36,-1333.57) -486.09,-1164.84 -486.09,-1074 -486.09,-891.02 -359.54,-764.46 -261.04,-665.97 -261.04,-604.04 -236.57,-579.57 -230,-573 -189,-573 ; v1(-169.39,-1333.57) -15.31,-1179.49 ; -15.76,-1179.49 -15.31,-1179.49 ; U1.2 383.28,-1179.49 ; DEBUG.5 383.28,-1179.49 ; -15.31,-1179.49 200.62,-1179.49 C2.2 383.28,-1179.49
pads on no net: POWER.3 U2.2 U2.3 U2.11 U2.25 U2.26 U2.27 U2.28 U2.29 U2.30 VOLUME.0

## Polygon pours and split planes (outlines as drawn)
GND on Top Layer "GND_L01_P001" (solid, remove dead copper, pour order 1): -1968.5,1968.51 1968.5,1968.5 1968.5,-1968.51 -1968.5,-1968.5
GND on Bottom Layer "GND_L02_P000" (solid, remove dead copper, pour order 0): -1968.5,1968.5 1968.5,1968.5 1968.51,-1968.5 -1968.51,-1968.51

## Keep-outs
Keep-Out Layer:
  circle w1: c-1496.06,-1496.06 r354.33
  circle w1: c1496.06,-1496.06 r354.33
  circle w1: c1496.06,1496.06 r354.33
  circle w1: c-1496.06,1496.06 r354.33
  lines w1: -1968.5,-1496.06 ccw(c-1496.06,-1496.06) -1496.06,-1968.5 1496.06,-1968.5 ccw(c1496.06,-1496.06) 1968.5,-1496.06 1968.5,1496.06 ccw(c1496.06,1496.06) 1496.06,1968.5 -1496.06,1968.5 ccw(c-1496.06,1496.06) -1968.5,1496.06 -1968.5,-1496.06

## Silkscreen, mask and mechanical layers (free items; w line width, h text height)
Top Overlay:
  circle w1: c-1496.06,-1496.06 r433.07
  circle w1: c1496.06,-1496.06 r433.07
  circle w1: c-1496.06,1496.06 r433.07
  circle w1: c1496.06,1496.06 r433.07
Bottom Overlay:
  lines w4: -1961.75,-324.6 -1961.75,325.77 -1386.32,325.77 -1386.32,-324.6 -1961.75,-324.6 ; 518.68,-1647.18 651.59,-1647.18 651.59,-1121.04 518.68,-1121.04 518.68,-1647.18
  text "BLUE" at -1038.7,1224.95 h120 r45
  text "GREEN" at 1249.77,1013.09 h120 r315
  text "GREEN" at 1387.31,124.96 h120
  text "BLUE" at 1387.31,24.96 h120
  text "RED" at 1387.31,-75.04 h120
  text "YELLOW" at 1387.31,-175.04 h120
  text "YELLOW" at 1346.92,-1067.14 h120 r45
  text "VCC" at 847.2,-1218.1 h120
  text "RED" at -1126.83,-1275.02 h120 r315
  text "CLK" at 847.2,-1318.1 h120
  text "GND" at 847.2,-1418.1 h120
  text "DIO" at 847.2,-1518.1 h120
  text "RST" at 847.2,-1618.1 h120
  text "OFF" at -202.39,-1833.56 h120
  text "ON" at 302.78,-1833.56 h120
Mechanical 1:
  circle w1: c-1496.06,-1496.06 r354.33
  circle w1: c1496.06,-1496.06 r354.33
  circle w1: c-1496.06,1496.06 r354.33
  circle w1: c1496.06,1496.06 r354.33
  lines w1: 1968.5,-1496.06 cw(c1496.06,-1496.06) 1496.06,-1968.5 -1496.06,-1968.5 cw(c-1496.06,-1496.06) -1968.5,-1496.06 -1968.5,1496.06 cw(c-1496.06,1496.06) -1496.06,1968.5 1496.06,1968.5 cw(c1496.06,1496.06) 1968.5,1496.06 ; 1968.5,-1246.06 1968.5,1746.06